# EAGLE board Basic PCB (EAGLE 9.5.1)
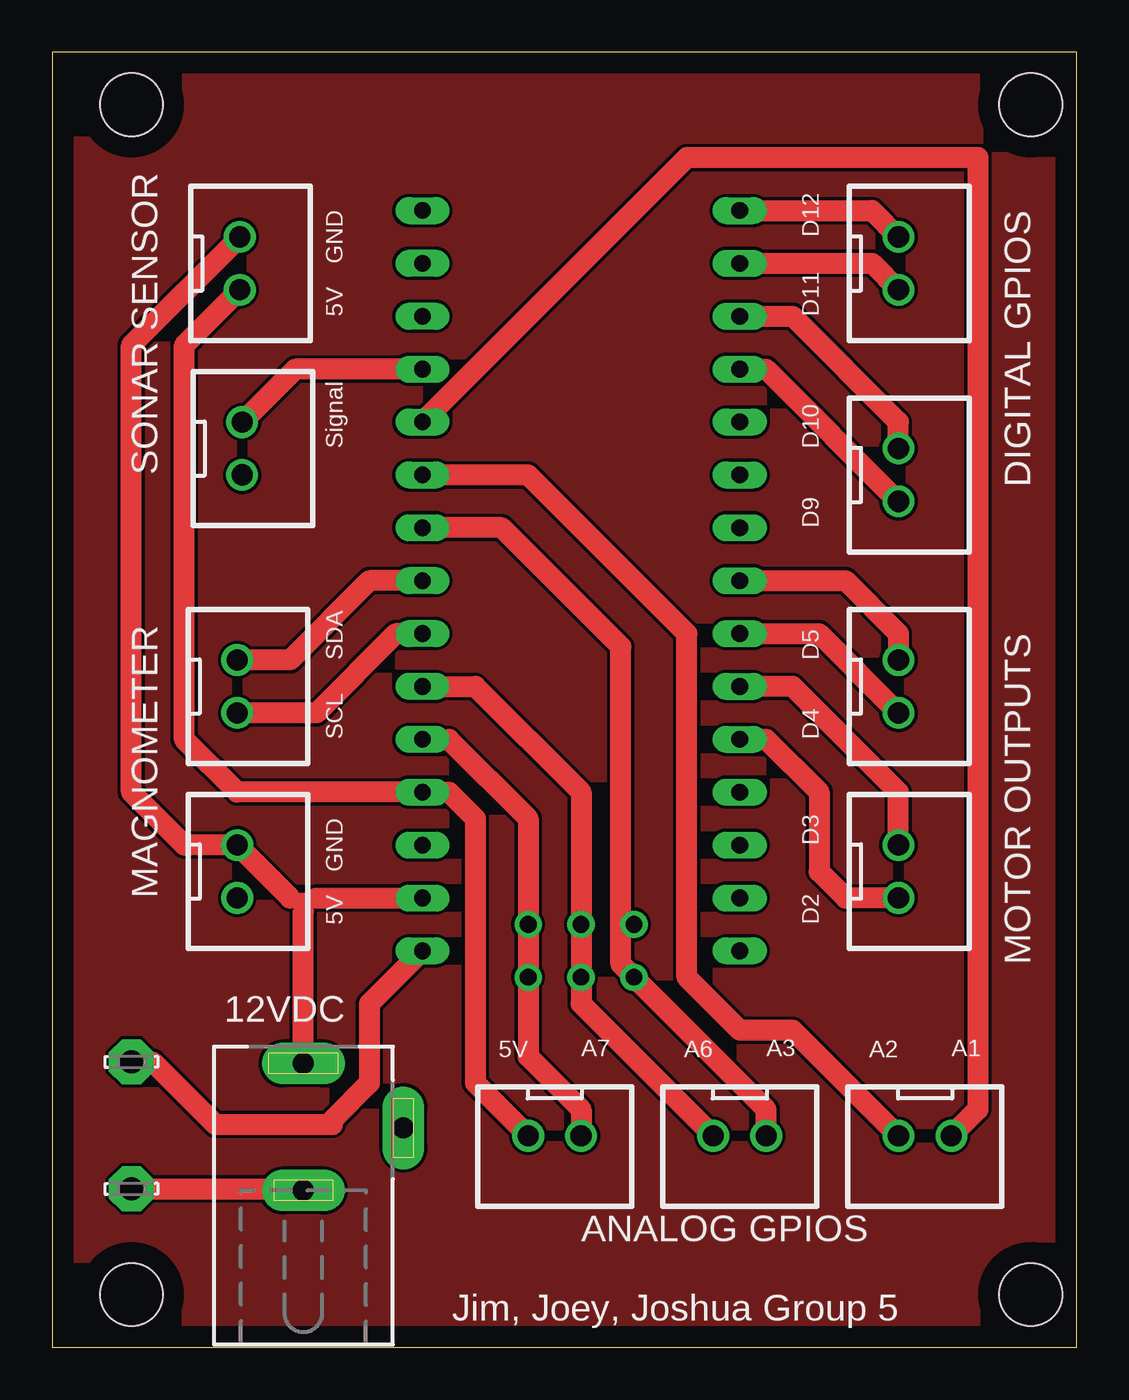
[diagram p0: board, top side]
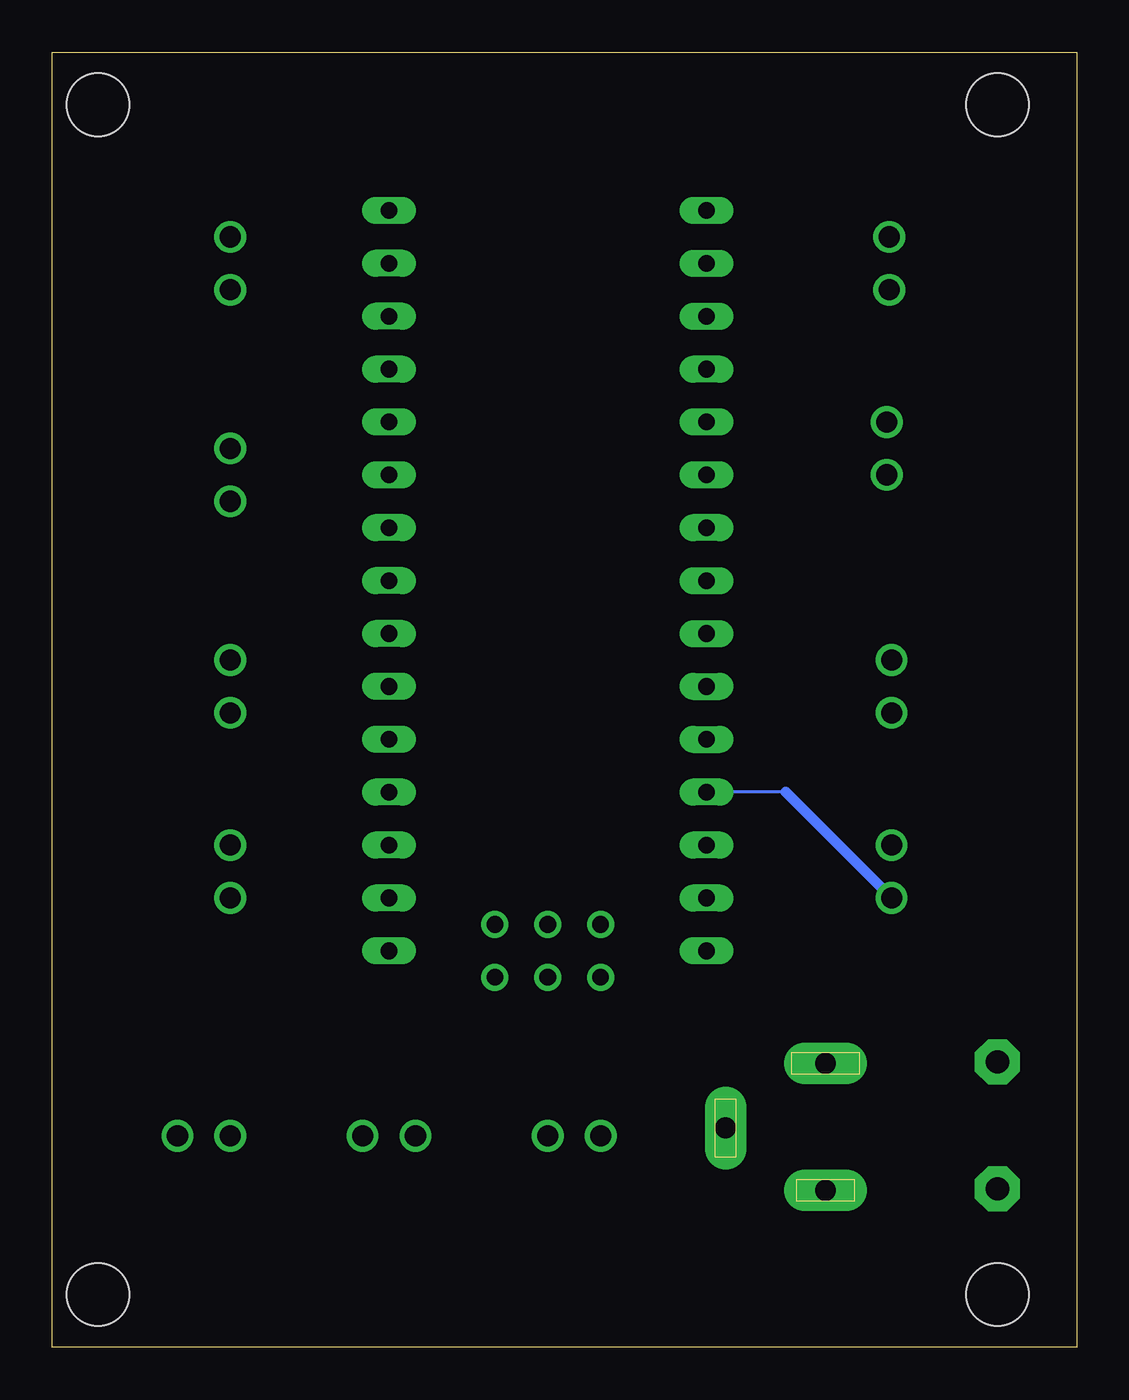
[diagram p1: board, bottom side, seen from below]

Size 49.2 x 62.22 mm. Coordinates in mm from the lower left corner, seen from the top.
Outline: 0,0 49.2,0 49.2,62.22 0,62.22 0,0
Copper layers (1*16): Top 0.035mm / dielectric 1.5mm / Bottom 0.035mm
Design rules "default": minimum track width 6mil, minimum drill 0.35mm, track to track 6mil, track to pad 6mil, pad to pad 6mil, via to via 6mil, smd to smd 6mil, copper to edge 40mil, drill to drill 6mil, minimum pad ring 10mil, minimum via ring 8mil, stop-mask expansion 4mil, vias tented up to drill 0mil, thermal gap 10mil
Holes 3 mm at 3.81,2.54 46.99,2.54 3.81,59.69 46.99,59.69

## Footprints (pad centres in the part's own frame; a part is rotated, then mirrored left to right if it is on the bottom)
DCJ0202 = drill 1 pad 2 long: 1 0,3.1; 2 4.8,0; 3 0,-3
LSP11 = drill 1.118 pad 2.159 octagon: MP 0,0
NANO = drill 0.8 long: 3.3V -10.16,24.13; 5V -10.16,-1.27; A0 -10.16,19.05; A1 -10.16,16.51; A2 -10.16,13.97; A3 -10.16,11.43; A4 -10.16,8.89; A5 -10.16,6.35; A6 -10.16,3.81; A7 -10.16,1.27; AREF -10.16,21.59; D2 5.08,1.27; D3 5.08,3.81; D4 5.08,6.35; D5 5.08,8.89; D6 5.08,11.43; D7 5.08,13.97; D8 5.08,16.51; D9 5.08,19.05; D10 5.08,21.59; D11 5.08,24.13; D12 5.08,26.67; D13 -10.16,26.67; GND -10.16,-6.35; GND1 5.08,-1.27; RAW -10.16,-8.89; RST -10.16,-3.81; RST1 5.08,-3.81; RX1 5.08,-6.35; TX0 5.08,-8.89 | drill 0.8: ICSP1 -5.08,-10.16; ICSP2 -5.08,-7.62; ICSP3 -2.54,-10.16; ICSP4 -2.54,-7.62; ICSP5 0,-10.16; ICSP6 0,-7.62
JST-XH-02-PACKAGE-ROUND-PAD = drill 1.016: 1 -1.27,0; 2 1.27,0

## Placement (x,y rotation side)
12VDC  DCJ0202  [DCJ0202]  12.06,10.54 0 top
LSP1  LSP11  [LSP11]  3.81,13.72 0 top
LSP2  LSP11  [LSP11]  3.81,7.62 0 top
U$1  NANO  [NANO]  27.94,27.94 0 top
X1  JST-XH-02-PIN-ROUND-PAD  [JST-XH-02-PACKAGE-ROUND-PAD]  40.64,31.75 270 top
X2  JST-XH-02-PIN-ROUND-PAD  [JST-XH-02-PACKAGE-ROUND-PAD]  40.64,22.86 270 top
X3  JST-XH-02-PIN-ROUND-PAD  [JST-XH-02-PACKAGE-ROUND-PAD]  40.64,41.91 270 top
X4  JST-XH-02-PIN-ROUND-PAD  [JST-XH-02-PACKAGE-ROUND-PAD]  9.01,52.07 270 top
X5  JST-XH-02-PIN-ROUND-PAD  [JST-XH-02-PACKAGE-ROUND-PAD]  40.64,52.07 270 top
X6  JST-XH-02-PIN-ROUND-PAD  [JST-XH-02-PACKAGE-ROUND-PAD]  9.12,43.18 270 top
X7  JST-XH-02-PIN-ROUND-PAD  [JST-XH-02-PACKAGE-ROUND-PAD]  8.89,22.86 270 top
X8  JST-XH-02-PIN-ROUND-PAD  [JST-XH-02-PACKAGE-ROUND-PAD]  8.89,31.75 270 top
X9  JST-XH-02-PIN-ROUND-PAD  [JST-XH-02-PACKAGE-ROUND-PAD]  41.91,10.16 180 top
X10  JST-XH-02-PIN-ROUND-PAD  [JST-XH-02-PACKAGE-ROUND-PAD]  33.02,10.16 180 top
X11  JST-XH-02-PIN-ROUND-PAD  [JST-XH-02-PACKAGE-ROUND-PAD]  24.13,10.16 180 top

## Library data of the parts
12VDC = con-jack; OC_FARNELL: unknown; OC_NEWARK: unknown
LSP1 LSP2 = solpad
U$1 = Arduino-clone
X1-X11 = Rembrandt Electronics - JST XH Connectors v1-0

## Nets
5V: U$1.5V X4.2 X7.2 X11.2
GND: 12VDC.1 U$1.GND X4.1 X7.1
N$1: U$1.D2 X2.2
N$2: U$1.D3 X2.1
N$3: U$1.D4 X1.2
N$4: U$1.D5 X1.1
N$5: U$1.D12 X5.1
N$6: U$1.D11 X5.2
N$7: U$1.D10 X3.1
N$8: U$1.D9 X3.2
N$9: U$1.A0 X6.1
N$13: U$1.A1 X9.1
N$14: U$1.A2 X9.2
N$15: U$1.A3 X10.1
N$16: U$1.A6 X10.2
N$17: U$1.A7 X11.1
SCL: U$1.A5 X8.2
SDA: U$1.A4 X8.1
VIN: 12VDC.3 LSP2.MP
VIN2: LSP1.MP U$1.RAW

## Tracks (layer width: path | path; a pad name or v marks a point on that pad's centre or on a via)
5V
  Top 1.016: X4.2 6.35,48.14 6.35,29.21 8.89,26.67 U$1.5V 19.05,26.67 20.32,25.4 20.32,12.7 X11.2
  Bottom 0.152: 13.97,26.67 U$1.5V
  Bottom 0.508: X7.2 13.97,26.67
GND
  Top 0.508: U$1.GND 11.43,21.59 | 12.7,21.59 12.06,20.95 | 12VDC.1 11.99,13.72
  Top 1.016: 11.43,21.59 X7.1 6.35,24.13 3.81,26.67 3.81,48.14 X4.1 | 12VDC.1 12.06,20.95 | 12.7,21.59 U$1.GND
N$1
  Top 1.016: X2.2 38.1,21.59 36.83,22.86 36.83,26.67 34.29,29.21 U$1.D2
N$2
  Top 1.016: X2.1 40.64,26.67 35.56,31.75 U$1.D3
N$3
  Top 1.016: U$1.D4 36.83,34.29 X1.2
N$4
  Top 1.016: U$1.D5 38.1,36.83 40.64,34.29 X1.1
N$5
  Top 1.016: U$1.D12 39.37,54.61 X5.1
N$6
  Top 1.016: U$1.D11 39.37,52.07 X5.2
N$7
  Top 1.016: U$1.D10 35.56,49.53 40.64,44.45 X3.1
N$8
  Top 1.016: U$1.D9 34.29,46.99 X3.2
N$9
  Top 1.016: U$1.A0 11.66,46.99 X6.1
N$10
  pour Top: 0,62.23 49.53,62.23 49.53,0 0,0
N$13
  Top 1.016: X9.1 44.45,11.43 44.45,57.15 30.48,57.15 U$1.A1
N$14
  Top 1.016: X9.2 35.56,15.24 33.02,15.24 30.48,17.78 30.48,34.29 22.86,41.91 U$1.A2
N$15
  Top 1.016: U$1.A3 21.59,39.37 27.3,33.66 27.3,18.41 34.29,11.43 X10.1
N$16
  Top 1.016: U$1.A6 20.32,31.75 25.4,26.67 25.4,16.51 X10.2
N$17
  Top 1.016: U$1.A7 19.05,29.21 22.86,25.4 22.86,13.97 25.4,11.43 X11.1
SCL
  Top 1.016: U$1.A5 16.51,34.29 12.7,30.48 X8.2
SDA
  Top 1.016: U$1.A4 15.24,36.83 11.43,33.02 X8.1
VIN
  Top 0.508: 11.99,7.62 12VDC.3
  Top 1.016: LSP2.MP 11.99,7.62
VIN2
  Top 1.016: LSP1.MP 4.83,13.72 7.84,10.71 13.46,10.71 13.46,10.92 15.24,12.7 15.24,16.51 U$1.RAW

## Text on the board
tNames: DIGITAL GPIOS | D12 | GND | 5V | D11 | Signal | D10 | SONAR SENSOR | D9 | MOTOR OUTPUTS | SDA | D5 | SCL | D4 | D3 | GND | MAGNOMETER | 5V | D2 | 5V | A6 | A2 | A7 | A3 | A1 | ANALOG GPIOS | Jim, Joey, Joshua Group 5